# Altium PCB IR_Remote.PcbDoc
Units mm, origin at the board's own origin, x right, y up, seen from the top; angles counter-clockwise.
Board outline 73 x 54 mm, 2 copper layers (Top Layer, Bottom Layer), stack 1.271 mm thick; 108 components, 72 nets, 302 pads, 204 vias.
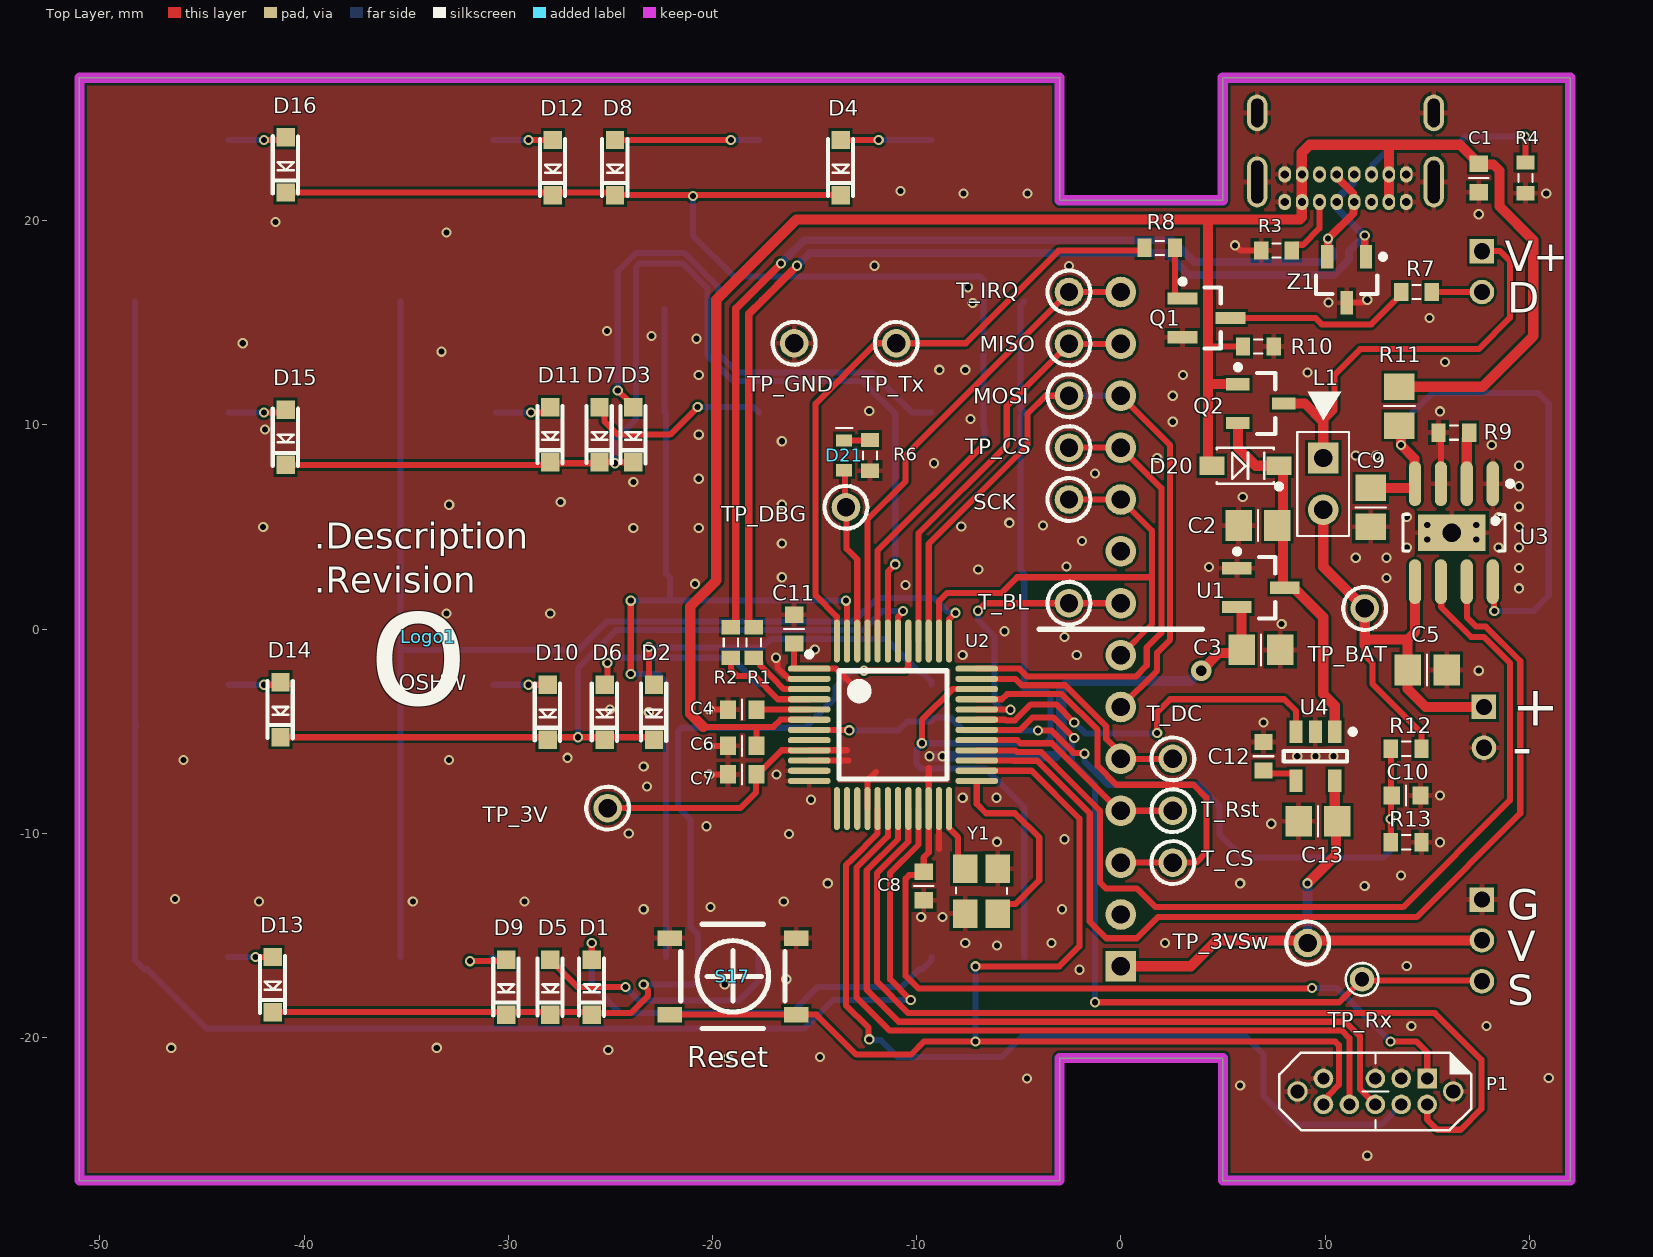
[diagram p0: Top Layer view]
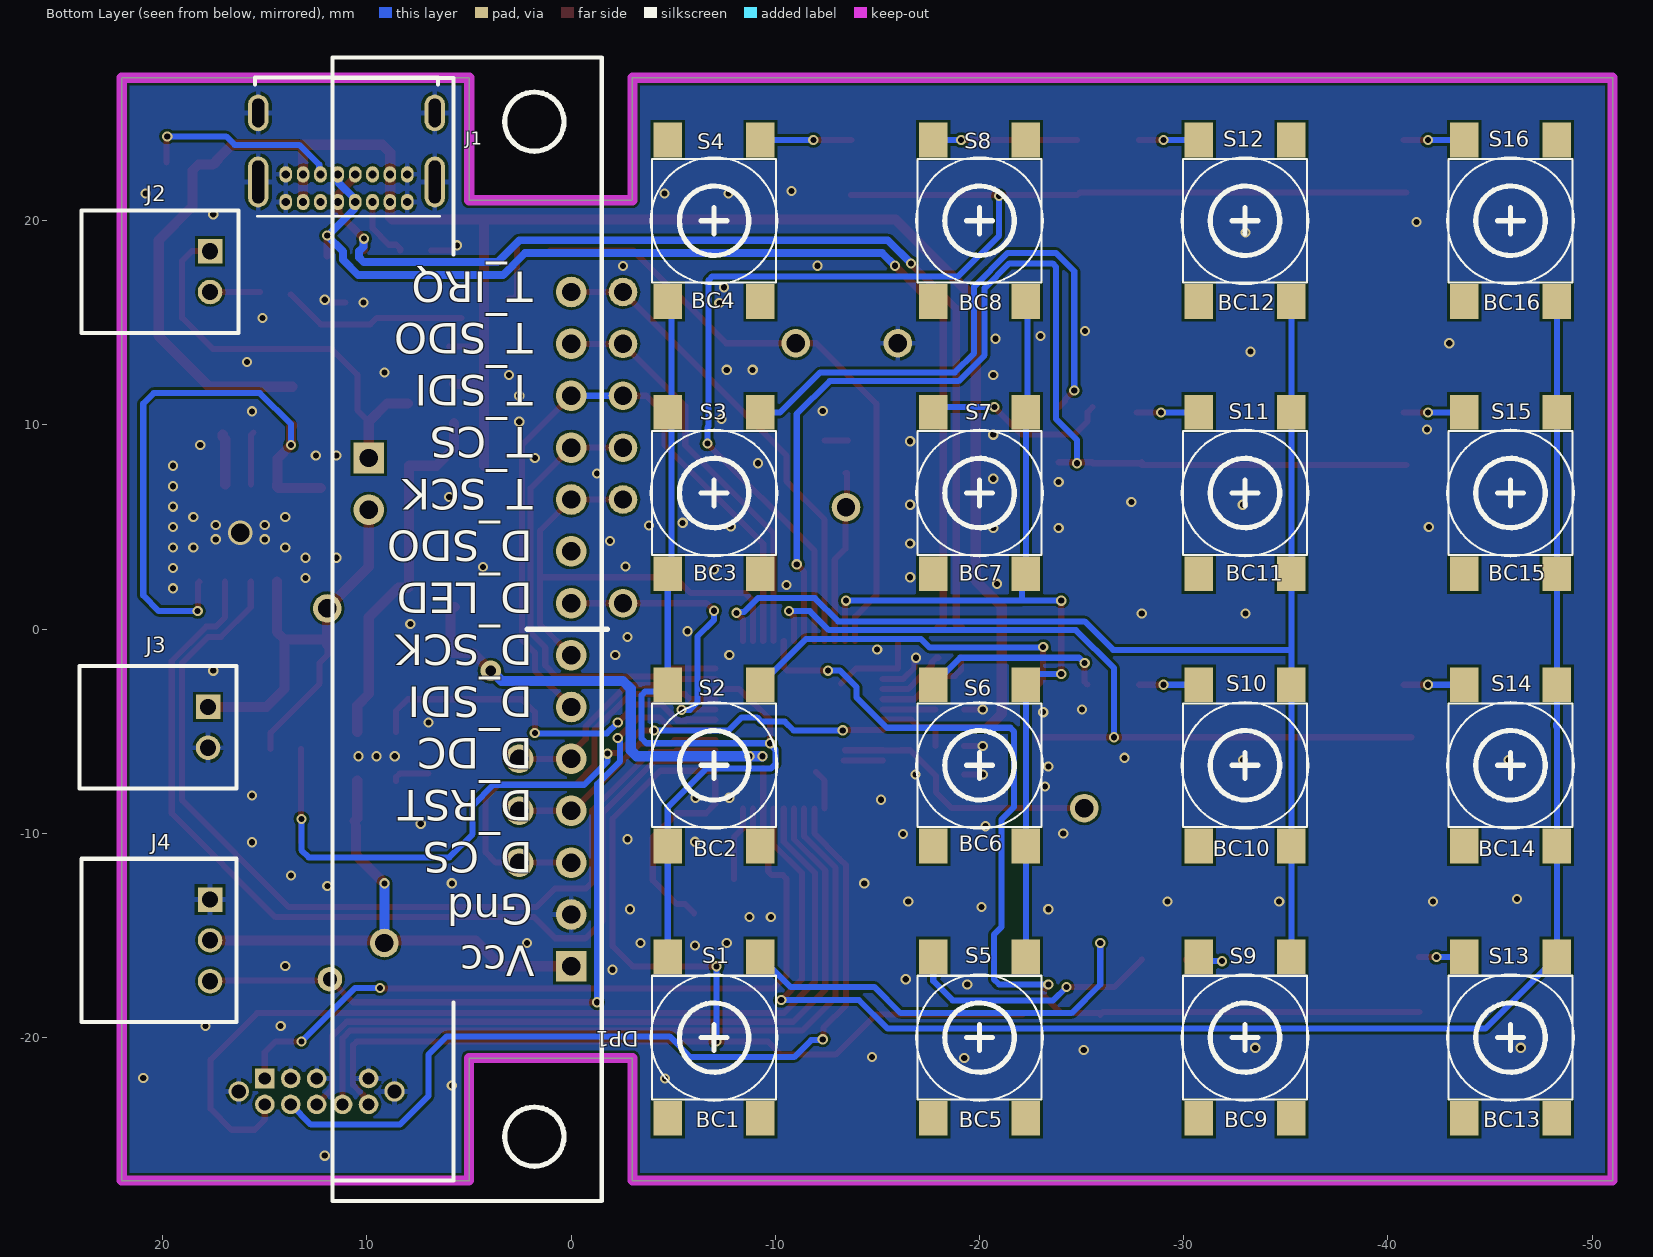
[diagram p1: Bottom Layer view, seen from below]
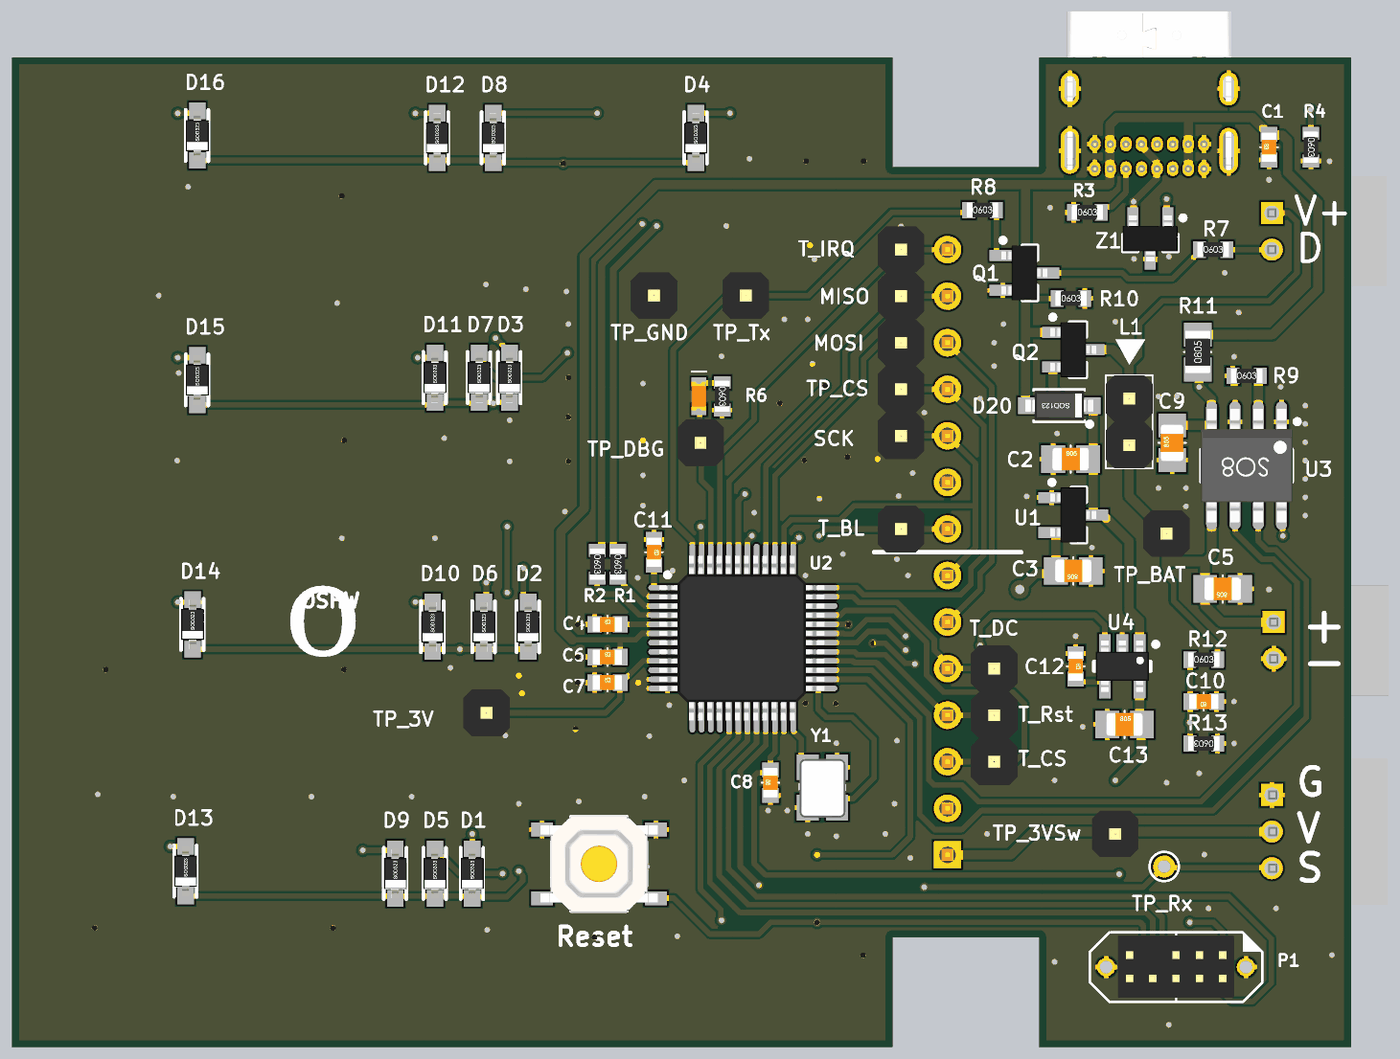
[diagram p2: 3D render of the assembled board from above, using the file's embedded part models]
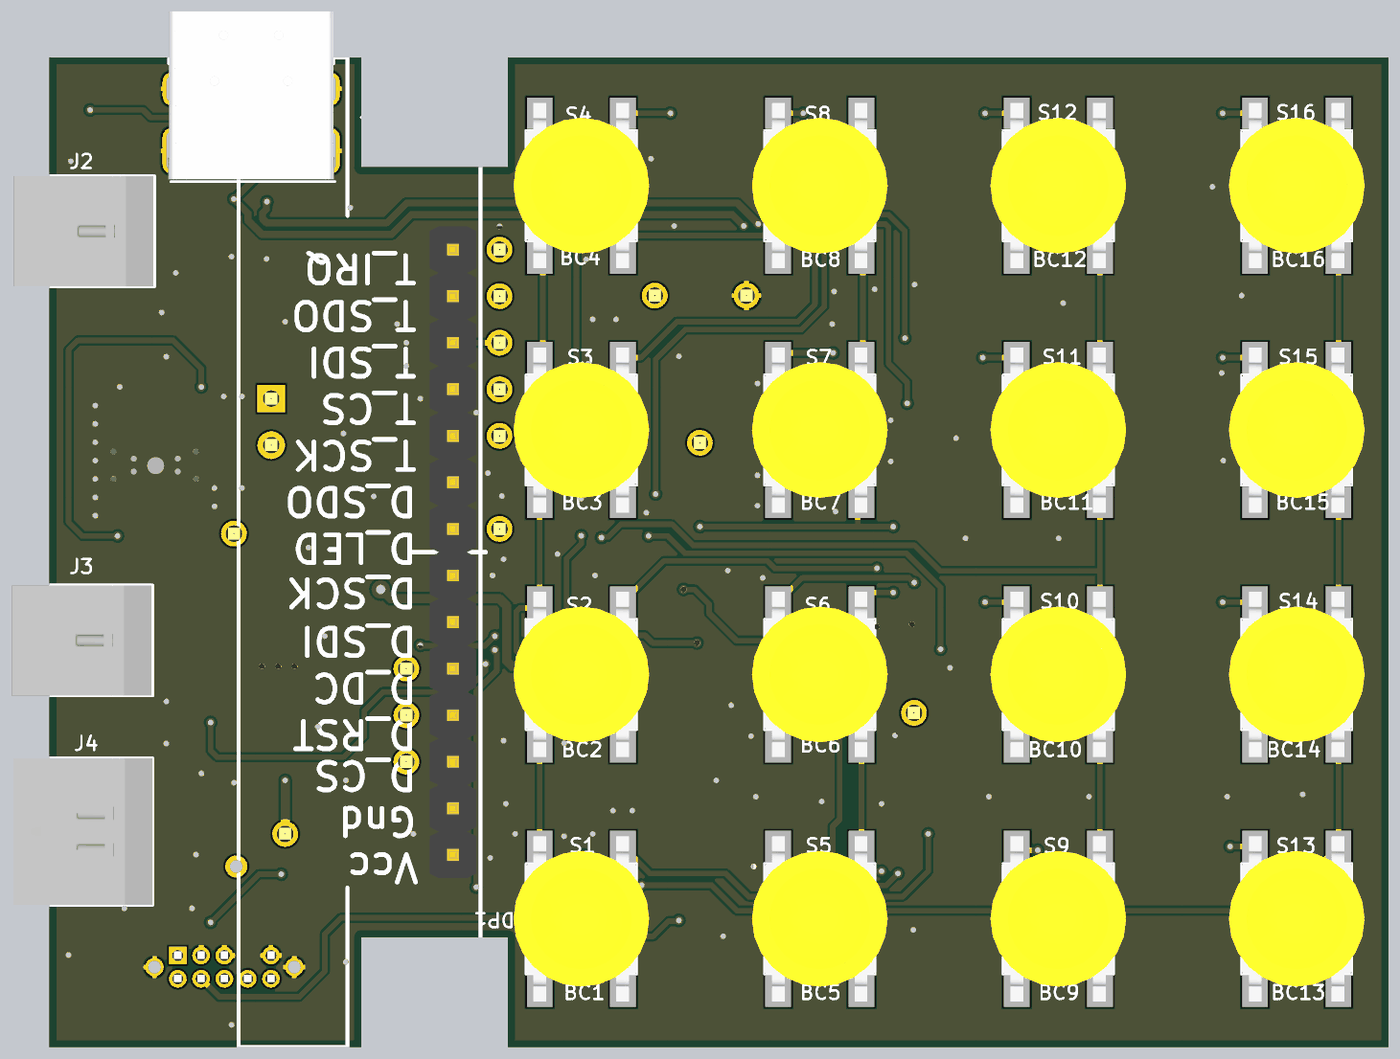
[diagram p3: 3D render of the assembled board from below, using the file's embedded part models]

## Layer stack, top to bottom
Top Solder: solder mask 0.0102, Solder Resist, Dk 3.5
Top Layer: signal copper 0.0356
Dielectric 1: dielectric 1.2, FR-4, Dk 4.8
Bottom Layer: signal copper 0.0356
Bottom Solder: solder mask 0.0102, Solder Resist, Dk 3.5

## Board outline
-51,-27 -51,27 -3,27 -3,21 5,21 4.988,21.012 4.988,27 22,27 22,-27 5,-27 5,-21 -3,-21 -3,-27

## Design rules (kind name [scope] priority, off if disabled: settings)
AssemblyTestPointUsage SilkToBoardRegionClearance_1 [All] p2:
AssemblyTestPointUsage SilkToBoardRegionClearance [All] p3:
Clearance [All] p1: gap=0.127 ignorepadtopadclearanceinfootprint=FALSE
DiffPairsRouting [All] p1: maxlimit=0.254 minlimit=0.254 mostfreqgap=0.254 toplayer_minwidth=0.381 toplayer_maxwidth=0.381 toplayer_prefwidth=0.381 bottomlayer_minwidth=0.381 bottomlayer_maxwidth=0.381 bottomlayer_prefwidth=0.381 maxuncoupledlength=12.7
HoleSize [All] p1: absolutevalues=TRUE maxlimit=6.35 minlimit=0.25 maxpercent=80.000 minpercent=20.000
MatchedLengths DiffPair_DIFF100MatchedLengths [InDifferentialPairClass('DIFF100')] p1: tolerance=0.152 checknetsindiffpair=TRUE checkdiffpairvsdiffpair=FALSE checkxsignals=FALSE checkothers=FALSE
MinimumAnnularRing [All] p1: minimumring=0.089
MinimumSolderMaskSliver [All] p1 off: minsoldermaskwidth=0.1
MinimumSolderMaskSliver SilkscreenOverComponentPads_2 [All] p2 off: minsoldermaskwidth=0.254
MinimumSolderMaskSliver SilkToSolderMaskClearance_1 [IsPad] p3 off: minsoldermaskwidth=0.254
MinimumSolderMaskSliver SilkscreenOverComponentPads_1 [All] p4 off: minsoldermaskwidth=0.254
MinimumSolderMaskSliver SilkToSolderMaskClearance [IsPad] p5 off: minsoldermaskwidth=0.254
MinimumSolderMaskSliver SilkscreenOverComponentPads [All] p6 off: minsoldermaskwidth=0.254
NetAntennae [All] p1 off: netantennaetolerance=0
PlaneClearance [All] p1: clearance=0.254
PlaneConnect [All] p1: planeconnectstyle=Relief reliefexpansion=0.508 reliefentries=4 reliefconductorwidth=0.254 reliefairgap=0.152
PolygonConnect PolygonConnect_Via [IsVia] p1: connectstyle=Direct reliefconductorwidth=0.254 reliefentries=4 polygonreliefangle="90 Angle" airgapwidth=0.254
PolygonConnect [All] p2: connectstyle=Relief reliefconductorwidth=0.254 reliefentries=4 polygonreliefangle="90 Angle" airgapwidth=0.152
RoomDefinition IR_Remote_Keypad [InComponentClass('IR_Remote_Keypad')] p1: confinementstyle=ConfineIn formatcopy=TRUE lockcomponents=FALSE outline -58.86,-29.845 61.409,-29.845 61.409,29.972 -58.86,29.972
RoutingVias [All] p1: holewidth=0.5 width=1 viastyle="Through Hole" minholewidth=0.305 minwidth=0.635 maxholewidth=0.711 maxwidth=1.27
SilkToBoardRegionClearance SilkToBoardRegionClearance_2 [All] p1 off:
SilkToSilkClearance [All] p1 off: silktosilkclearance=0.254
SilkToSolderMaskClearance SilkToSolderMaskClearance_2 [IsPad] p1 off: minsilkscreentomaskgap=0.254 clearancetoexposedcopper=TRUE
SolderMaskExpansion SolderMaskExpansion_Via [isVia] p1: expansion=0.102 istentingtop=TRUE
SolderMaskExpansion [All] p2: expansion=0.102 istentingtop=FALSE
SupplyNets "Schematic Supply Nets_6" [InNet('BAT++')] p1: voltage=0.000
SupplyNets "Schematic Supply Nets" [InNet('3V3')] p2: voltage=0.000
SupplyNets "Schematic Supply Nets_5" [InNet('BAT+')] p3: voltage=0.000
SupplyNets "Schematic Supply Nets_4" [InNet('Gnd')] p4: voltage=0.000
SupplyNets "Schematic Supply Nets_3" [InNet('5Vusb')] p5: voltage=0.000
SupplyNets "Schematic Supply Nets_2" [InNet('Vout3V3')] p6: voltage=0.000
SupplyNets "Schematic Supply Nets_1" [InNet('3V3Sw')] p7: voltage=0.000
Width [All] p1: maxlimit=2.54 minlimit=0.152 preferedwidth=0.3
21 further rules are at their usual default settings.

## Classes and differential pairs
component class IR_Remote_Keypad: BC1 BC2 BC3 BC4 BC5 BC6 BC7 BC8 BC9 BC10 BC11 BC12 BC13 BC14 BC15 BC16 D1 D2 D3 D4 D5 D6 D7 D8 D9 D10 D11 D12 D13 D14 D15 D16 S1 S2 S3 S4 S5 S6 S7 S8 S9 S10 S11 S12 S13 S14 S15 S16
component class IR_Remote: C1 C2 C3 C4 C5 C6 C7 C8 C9 C10 C11 C12 C13 D20 D21 DP1 J1 J2 J3 J4 L1 Logo1 MISO MOSI P1 Q1 Q2 R1 R2 R3 R4 R6 R7 R8 R9 R10 R11 R12 R13 RN? S17 SCK T_BL T_CS T_DC T_IRQ T_Rst TP_3V TP_3VSw TP_BAT TP_CS TP_DBG TP_GND TP_Rx TP_Tx U1 U2 U3 U4 Y1 Z1
differential pair USBD_R: +USBD_R_P -USBD_R_N

## Components (designator, comment, footprint, x,y, rotation, side; value= is the part's Value field where it differs from the comment)
BC1 "Button cap" BUTTON-CAP-WITH-SKIRT -7,-20 r0 bottom locked
BC2 "Button cap" BUTTON-CAP-WITH-SKIRT -7,-6.667 r0 bottom locked
BC3 "Button cap" BUTTON-CAP-WITH-SKIRT -7,6.667 r0 bottom locked
BC4 "Button cap" BUTTON-CAP-WITH-SKIRT -7,20 r0 bottom locked
BC5 "Button cap" BUTTON-CAP-WITH-SKIRT -20,-20 r0 bottom locked
BC6 "Button cap" BUTTON-CAP-WITH-SKIRT -20,-6.667 r0 bottom locked
BC7 "Button cap" BUTTON-CAP-WITH-SKIRT -20,6.667 r0 bottom locked
BC8 "Button cap" BUTTON-CAP-WITH-SKIRT -20,20 r0 bottom locked
BC9 "Button cap" BUTTON-CAP-WITH-SKIRT -33,-20 r0 bottom locked
BC10 "Button cap" BUTTON-CAP-WITH-SKIRT -33,-6.667 r0 bottom locked
BC11 "Button cap" BUTTON-CAP-WITH-SKIRT -33,6.667 r0 bottom locked
BC12 "Button cap" BUTTON-CAP-WITH-SKIRT -33,20 r0 bottom locked
BC13 "Button cap" BUTTON-CAP-WITH-SKIRT -46,-20 r0 bottom locked
BC14 "Button cap" BUTTON-CAP-WITH-SKIRT -46,-6.667 r0 bottom locked
BC15 "Button cap" BUTTON-CAP-WITH-SKIRT -46,6.667 r0 bottom locked
BC16 "Button cap" BUTTON-CAP-WITH-SKIRT -46,20 r0 bottom locked
C1 "100nF" CCNP1608-0603_N 17.526,22.098 r90 top
C2 "10uF" CCNP2012-0805 6.714,5.079 r0 top
C3 "10uF" CCNP2012-0805 6.858,-1.016 r180 top
C4 "2.2uF" CCNP1608-0603_N -18.542,-3.937 r0 top
C5 "10uF" CCNP2012-0805 15,-2 r180 top
C6 "100nF" CCNP1608-0603_N -18.542,-5.715 r0 top
C7 "100nF" CCNP1608-0603_N -18.542,-7.112 r0 top
C8 "100nF" CCNP1608-0603_N -9.652,-12.573 r90 top
C9 "10uF" CCNP2012-0805 12.243,5.969 r90 top
C10 "100nF" CCNP1608-0603_N 13.97,-8.147 r180 top
C11 "100nF" CCNP1608-0603_N -16.002,0 r270 top
C12 "10nF" CCNP1608-0603_N 6.985,-6.223 r270 top
C13 "10uF" CCNP2012-0805 9.652,-9.398 r0 top
D1 "1N4148WS" SOD-323 -25.908,-17.526 r90 top
D2 "1N4148WS" SOD-323 -22.86,-4.064 r90 top
D3 "1N4148WS" SOD-323 -23.876,9.525 r90 top
D4 "1N4148WS" SOD-323 -13.716,22.606 r90 top
D5 "1N4148WS" SOD-323 -27.94,-17.526 r90 top
D6 "1N4148WS" SOD-323 -25.273,-4.064 r90 top
D7 "1N4148WS" SOD-323 -25.527,9.525 r90 top
D8 "1N4148WS" SOD-323 -24.765,22.606 r90 top
D9 "1N4148WS" SOD-323 -30.099,-17.526 r90 top
D10 "1N4148WS" SOD-323 -28.067,-4.064 r90 top
D11 "1N4148WS" SOD-323 -27.94,9.525 r90 top
D12 "1N4148WS" SOD-323 -27.813,22.606 r90 top
D13 "1N4148WS" SOD-323 -41.529,-17.399 r90 top
D14 "1N4148WS" SOD-323 -41.148,-3.937 r90 top
D15 "1N4148WS" SOD-323 -40.894,9.398 r90 top
D16 "1N4148WS" SOD-323 -40.894,22.733 r90 top
D20 "B5819W" SOD-123 6.096,8.001 r180 top
D21 "LED Red" LED1608-0603-RED_N -13.554,8.509 r270 top
DP1 "TFT Display" "TFT_320x480 - connector only" 0,-16.51 r0 bottom locked
J1 "USB4085-GF-A" USB4085-GF-A 11,23.1 r270 bottom locked
J2 "Connector - JST PH 2-Pin right-angle" JST-P2B-PH-RA 17.68,18.51 r90 bottom locked
J3 "Connector - JST PH 2-Pin right-angle" JST-P2B-PH-RA 17.78,-3.81 r90 bottom locked
J4 "Connector - JST PH 3-Pin right-angle" JST-P3B-PH-RA 17.68,-13.24 r90 bottom locked
L1 "Header, 2-Pin" HDR1X2S 9.906,8.382 r270 top
Logo1 "OSHW Logo" OSHW -33.909,-0.381 r0 top
MISO "TP" "PCBPIN - 0.9mm" -2.54,13.97 r0 top
MOSI "TP" "PCBPIN - 0.9mm" -2.54,6.35 r0 top
P1 "SWD Connector 2x5-Pin" SWD-2X5-JIG-HEADER 15,-22 r180 top locked
Q1 "MMBT3904LT1G" SOT23_M 4.191,15.24 r180 top
Q2 "SI2301CDS-T1-GE3" SOT23_N 6.858,11.049 r180 top
R1 "330R" CR1608-0603_N -17.979,-0.652 r270 top
R2 "330R" CR1608-0603_N -19.097,-0.652 r270 top
R3 "5.1K" CR1608-0603_N 7.62,18.542 r0 top
R4 "5.1K" CR1608-0603_N 19.812,22.098 r270 top
R6 "10K" CR1608-0603_N -12.284,8.509 r270 top value=10k
R7 "0R" CR1608-0603_N 14.478,16.51 r0 top
R8 "10k" CR1608-0603_N 1.905,18.669 r0 top
R9 "1.5k" CR1608-0603_N 16.307,9.627 r0 top
R10 "75k" CR1608-0603_N 6.731,13.843 r0 top
R11 "0R4" CR2012-0805 13.64,10.922 r90 top
R12 "56k" CR1608-0603_N 13.97,-5.861 r0 top
R13 "56k" CR1608-0603_N 13.97,-10.433 r180 top
S1 "SW_SMT_14mm" SW_SMT_14MM -7,-20 r270 bottom locked
S2 "SW_SMT_14mm" SW_SMT_14MM -7,-6.667 r270 bottom locked
S3 "SW_SMT_14mm" SW_SMT_14MM -7,6.667 r270 bottom locked
S4 "SW_SMT_14mm" SW_SMT_14MM -7,20 r270 bottom locked
S5 "SW_SMT_14mm" SW_SMT_14MM -20,-20 r270 bottom locked
S6 "SW_SMT_14mm" SW_SMT_14MM -20,-6.667 r270 bottom locked
S7 "SW_SMT_14mm" SW_SMT_14MM -20,6.667 r270 bottom locked
S8 "SW_SMT_14mm" SW_SMT_14MM -20,20 r270 bottom locked
S9 "SW_SMT_14mm" SW_SMT_14MM -33,-20 r270 bottom locked
S10 "SW_SMT_14mm" SW_SMT_14MM -33,-6.667 r270 bottom locked
S11 "SW_SMT_14mm" SW_SMT_14MM -33,6.667 r270 bottom locked
S12 "SW_SMT_14mm" SW_SMT_14MM -33,20 r270 bottom locked
S13 "SW_SMT_14mm" SW_SMT_14MM -46,-20 r270 bottom locked
S14 "SW_SMT_14mm" SW_SMT_14MM -46,-6.667 r270 bottom locked
S15 "SW_SMT_14mm" SW_SMT_14MM -46,6.667 r270 bottom locked
S16 "SW_SMT_14mm" SW_SMT_14MM -46,20 r270 bottom locked
S17 "Reset" SMD-SW-4_5.1x5.1x3.5_M -19,-17 r0 top locked
SCK "TP" "PCBPIN - 0.9mm" -2.54,11.43 r0 top
T_BL "TP" "PCBPIN - 0.9mm" -2.54,1.27 r0 top
T_CS "TP" "PCBPIN - 0.9mm" 2.54,-11.43 r0 top
T_DC "TP" "PCBPIN - 0.9mm" 2.54,-6.35 r0 top
T_IRQ "TP" "PCBPIN - 0.9mm" -2.54,16.51 r0 top
T_Rst "TP" "PCBPIN - 0.9mm" 2.54,-8.89 r0 top
TP_3V "TP" "PCBPIN - 0.9mm" -25.132,-8.763 r90 top
TP_3VSw "TP" "PCBPIN - 0.9mm" 9.144,-15.367 r90 top
TP_BAT "TP" "PCBPIN - 0.9mm" 11.938,1.016 r90 top
TP_CS "TP" "PCBPIN - 0.9mm" -2.54,8.89 r90 top
TP_DBG "TP" "PCBPIN - 0.9mm" -13.462,5.969 r90 top
TP_GND "TP" "PCBPIN - 0.9mm" -16,14 r90 top
TP_Rx "TP" "PCBPIN - 0.7mm" 11.811,-17.145 r0 top
TP_Tx "TP" "PCBPIN - 0.9mm" -11,14 r90 top
U1 "XC6206P332MR" SOT23_M 6.858,2.032 r180 top
U2 "MK20DX128VLF5" TSQFP50P900X900-48M -11.159,-4.683 r270 top locked
U3 "TP4056" ESOP8 16.305,4.724 r180 top
U4 "SPX3819M5-L-3-3/TR" SOT23-5_N 9.525,-6.223 r90 top
Y1 "16 MHz" Crystal_SMD_3.2x2.5 -6.823,-12.827 r270 top
Z1 "GSOT05C-GS08" SOT23_N 11.055,17.113 r90 top

## Footprints (in the part's own frame and the unit in brackets; to place one, negate y for a bottom-side part, rotate by r counter-clockwise, add the part's x,y. Pads: shape width x height; smd on the part's side, far side on the other; paste and mask are expansions set on the pad)
BUTTON-CAP-WITH-SKIRT [mm] "5.5 mm x 4.5mm (WxH) button cap for small tactile switches"
  silkscreen extent -3.1,-3.1 3.1,3.1, body extent -3.69,-3.7 3.7,3.7, height 16
CCNP1608-0603_N [mm]
  rect 0.8x0.9 smd: 1(-0.7,0) 2(0.7,0)
  silkscreen extent 0,-0.48 0,0.48, body extent -0.8,-0.4 0.8,0.4, height 0.3
CCNP2012-0805 [mm]
  rect 1.3x1.5 smd: 1(-0.95,0) 2(0.95,0)
  silkscreen extent 0,-0.75 0,0.75, body extent -1,-0.62 1,0.63, height 0.78
CR1608-0603_N [mm]
  rect 0.7x0.9 smd: 1(-0.75,0) 2(0.75,0)
  silkscreen extent -0.2,-0.35 0.2,0.35, body extent -0.85,-0.4 0.85,0.4, height 0.56
CR2012-0805 [mm]
  rect 1.3x1.5 smd: 1(-0.95,0) 2(0.95,0)
  silkscreen extent 0,-0.75 0,0.75, body extent -1.15,-0.67 1.15,0.68, height 0.76
Crystal_SMD_3.2x2.5 [mm] "Crystal SMT low profile 3.2 x 2.5 SMD"
  rect 1.4x1.2 smd: 1(-1.1,-0.8) 2(1.1,-0.8) 3(1.1,0.8) 4(-1.1,0.8)
  silkscreen extent -0.17,-1.25 0.15,1.25, body extent -1.55,-1.24 1.65,1.26, height 0.7
ESOP8 [mm] "8-Pin Small Outline Integrated Circuit 1.27 mm Pitch, IPC Medium Density with heat pad"
  rect 3.3x1.8 smd: 0(0.1,0)
  oval 0.6x2.2 smd: 1(-1.905,-2.4) 2(-0.635,-2.4) 3(0.635,-2.4) 4(1.905,-2.4) 5(1.905,2.4) 6(0.635,2.4) 7(-0.635,2.4) 8(-1.905,2.4)
  silkscreen extent -2.88,-2.52 2.5,0.9, body extent -2.5,-3.1 2.5,3.1, height 1.75
HDR1X2S [mm] "Header; 2 Position; Straight"
  rect 1.5x1.5 hole 0.9: 1(0,0)
  round 1.5 hole 0.9: 2(2.54,0)
  silkscreen extent -3.24,-1.27 3.81,1.27, body extent -1.27,-1.27 3.81,1.27, height 6
JST-P2B-PH-RA [mm] "JST-PH 2 pin connector right-angle"
  rect 1.2x1.2 hole 0.8: 1(0,0)
  round 1.2 hole 0.8: 2(-2,0)
  silkscreen extent -4,-1.4 2,6.3, body extent -4,-1.35 2,6.25, height 5
JST-P3B-PH-RA [mm] "JST-PH 3 pin  connector right-angle"
  rect 1.2x1.2 hole 0.8: 1(0,0)
  round 1.2 hole 0.8: 2(-2,0) 3(-4,0)
  silkscreen extent -6,-1.3 2,6.3, body extent -6,-1.3 2,6.3, height 5
LED1608-0603-RED_N [mm] "SMT-LED 0603"
  rect 0.6x0.8 smd: A(0.725,0) K(-0.725,0)
  silkscreen extent -1.35,-0.39 -1.35,0.41, body extent -0.8,-0.4 0.8,0.4, height 0.7
OSHW [mm] "OSHW Logo"
"PCBPIN - 0.7mm" [mm]
  round 1.2 hole 0.7: 1(0,0)
  silkscreen extent -0.8,-0.8 0.8,0.8
"PCBPIN - 0.9mm" [mm]
  round 1.4 hole 0.9: 1(0,0)
  silkscreen extent -1.05,-1.05 1.05,1.05, body extent -1.27,-1.27 1.27,1.27, height 6
SMD-SW-4_5.1x5.1x3.5_M [mm] "Miniature SMD PCB Push Button - C318886"
  rect 1.2x0.762 smd: 1(3.1,-1.875) 1b(-3.1,-1.875) 2(3.1,1.875) 2b(-3.1,1.875)
  silkscreen extent -2.55,-2.55 2.55,2.55, body extent -3.2,-2.65 3.2,2.65, height 3.5
SOD-123 [mm] "SOD-123; 2 Leads; Body 2.7 x 1.6 mm, (LxW)"
  rect 1.22x0.91 smd: A(1.64,0) K(-1.64,0)
  silkscreen extent -1.78,-0.89 1.41,1.14, body extent -1.85,-0.77 1.85,0.78, height 1.35
SOD-323 [mm]
  rect 0.9x0.9 smd: A(1.347,0.004) K(-1.353,0.004)
  silkscreen extent -1.4,-0.6 1.4,0.64, body extent -1.35,-0.62 1.35,0.63, height 1.1
SOT23-5_N [mm] "SOT23, 5-Leads, Body 2.9x1.6mm, Pitch 0.95mm, Lead Span 2.7mm, IPC Medium Density"
  rect 1.1x0.65 smd: 1(1.2,-0.95) 2(1.2,0) 3(1.2,0.95) 4(-1.2,0.95) 5(-1.2,-0.95)
  silkscreen extent -0.25,-1.95 1.32,1.55, body extent -1.4,-1.45 1.4,1.45, height 1.45
SOT23_M [mm] "SOT23, 3-Leads, Body 2.9x1.3mm, Pitch 0.95mm, Lead Span 2.3mm - IPC Low Density"
  rect 1.45x0.6 smd: 1(1.175,-0.95) 2(1.175,0.95) 3(-1.175,0)
  silkscreen extent -0.7,-1.9 1.29,1.5, body extent -1.25,-1.5 1.25,1.5, height 1.05
SOT23_N [mm] "SOT23, 3-Leads, Body 2.9x1.3mm, Pitch 0.95mm, Lead Span 2.3mm - IPC Medium Density"
  rect 1.15x0.6 smd: 1(1.125,-0.95) 2(1.125,0.95) 3(-1.125,0)
  silkscreen extent -0.7,-1.9 1.25,1.5, body extent -1.25,-1.5 1.25,1.5, height 1.05
SW_SMT_14MM [mm] "SMT Tactile Switch / 14.7 mm stem (from PCB)"
  rect 1.7x1.4 smd: 1(-3.95,2.27) 1b(3.95,2.27) 2(-3.95,-2.27) 2b(3.95,-2.27)
  silkscreen extent -3.03,-3.03 3.03,3.03, body extent -4.5,-3 4.5,3, height 14.7
SWD-2X5-JIG-HEADER [mm] "Connector; SWD; 2x5 Position"
  round 1 hole 0.7: 0(-1.27,0.635) 0(6.35,0.635)
  rect 0.96x0.96 hole 0.6: 1(0,0)
  round 0.96 hole 0.6: 2(0,1.27) 3(1.27,0) 4(1.27,1.27) 5(2.54,0) 6(2.54,1.27) 8(3.81,1.27) 9(5.08,0) 10(5.08,1.27)
  silkscreen extent -2.16,-1.26 7.24,2.53, body extent -0.63,-1.09 5.72,2.31, height 4.5
"TFT_320x480 - connector only" [mm] "TFT Display 320x480 with touch (IL9488+XPT2046)"
  rect 1.5x1.5 hole 0.9: 1(0,0)
  round 1.5 hole 0.9: 2(0,-2.54) 3(0,-5.08) 4(0,-7.62) 5(0,-10.16) 6(0,-12.7) 7(0,-15.24) 8(0,-17.78) 9(0,-20.32) 10(0,-22.86) 11(0,-25.4) 12(0,-27.94) 13(0,-30.48) 14(0,-33.02)
  silkscreen extent -1.5,-44.51 11.68,11.49, body extent -1.27,-34.29 1.27,1.27, height 8.57
TSQFP50P900X900-48M [mm] "Thin QFP, 48-Leads, Body 7x7mm, Pitch 0.5mm, IPC Low Density"
  oval 0.3x2.1 smd: 1(-2.75,-4.1) 2(-2.25,-4.1) 3(-1.75,-4.1) 4(-1.25,-4.1) 5(-0.75,-4.1) 6(-0.25,-4.1) 7(0.25,-4.1) 8(0.75,-4.1) 9(1.25,-4.1) 10(1.75,-4.1) 11(2.25,-4.1) 12(2.75,-4.1) 25(2.75,4.1) 26(2.25,4.1) 27(1.75,4.1) 28(1.25,4.1) 29(0.75,4.1) 30(0.25,4.1) 31(-0.25,4.1) 32(-0.75,4.1) 33(-1.25,4.1) 34(-1.75,4.1) 35(-2.25,4.1) 36(-2.75,4.1)
  oval 2.1x0.3 smd: 13(4.1,-2.75) 14(4.1,-2.25) 15(4.1,-1.75) 16(4.1,-1.25) 17(4.1,-0.75) 18(4.1,-0.25) 19(4.1,0.25) 20(4.1,0.75) 21(4.1,1.25) 22(4.1,1.75) 23(4.1,2.25) 24(4.1,2.75) 37(-4.1,2.75) 38(-4.1,2.25) 39(-4.1,1.75) 40(-4.1,1.25) 41(-4.1,0.75) 42(-4.1,0.25) 43(-4.1,-0.25) 44(-4.1,-0.75) 45(-4.1,-1.25) 46(-4.1,-1.75) 47(-4.1,-2.25) 48(-4.1,-2.75)
  silkscreen extent -3.57,-4.22 2.65,2.65, body extent -4.5,-4.55 4.5,4.45, height 1.6
USB4085-GF-A [mm] "USB-C Connector"
  oval 0.8x0.62 hole 0.4: A1(2.18,2.975) A4(2.18,2.125) A5(2.18,1.275) A6(2.18,0.425) A7(2.18,-0.425) A8(2.18,-1.275) A9(2.18,-2.125) A12(2.18,-2.975) B1(0.83,-2.975) B4(0.83,-2.125) B5(0.83,-1.275) B6(0.83,-0.425) B7(0.83,0.425) B8(0.83,1.275) B9(0.83,2.125) B12(0.83,2.975)
  oval 1.8x1 hole 0.6 slot 1.4 at 0 deg: SH(-2.18,-4.325) SH(-2.18,4.325)
  oval 2.5x1 hole 0.6 slot 2.1 at 0 deg: SH(1.2,-4.325) SH(1.2,4.325)
  silkscreen extent -3.92,-4.47 2.88,4.57, body extent -6.41,-4.52 2.76,4.51, height 3.46

## Part data
BC1 BC2 BC3 BC4 BC5 BC6 BC7 BC8 BC9 BC10 BC11 BC12 BC13 BC14 BC15 BC16: library part "Small Button Cap", "6.2mm x 6mm (WxH) button cap"
C1 C6 C7 C8 C10 C11: library part Cap_CCNP_0603, "Capacitor non-polar SMT 0603", LCSC=C14663, Manufacturer="Generic Components", Class=Passive, Published=08/06/2000, Publisher="Altium Hobart Technology Centre", SubClass=Capacitor
C2 C3 C5 C9 C13: library part Cap, "Capacitor", LCSC=C15850, Manufacturer="Generic Components", Class=Passive, Published=08/06/2000, Publisher="Altium Hobart Technology Centre", SubClass=Capacitor
C4: library part Cap_CCNP_0603, "Capacitor non-polar SMT 0603", LCSC=C23630, Manufacturer="Generic Components", Class=Passive, Published=08/06/2000, Publisher="Altium Hobart Technology Centre", SubClass=Capacitor
C12: library part Cap_CCNP_0603_10nF, "50V 10nF X7R ±10% 0603 MLCC", LCSC=C57112, Manufacturer="Generic Components", Class=Passive, Published=08/06/2000, Publisher="Altium Hobart Technology Centre", SubClass=Capacitor
D1 D2 D3 D4 D5 D6 D7 D8 D9 D10 D11 D12 D13 D14 D15 D16: "Diode - Switching 100V 150mA 1.25V@150mA 4ns SOD-323", LCSC=C2128, Class=Discrete, Farnell PN=2889105, SubClass="Diode - Switching"
D20: "Diode - Schottky 1A 40V Vrm SOD-123", LCSC=C8598, Manufacturer="Generic Components", Class=Discrete, Published=08/06/2000, Publisher="Altium Hobart Technology Centre", SubClass="Diode - Switching"
D21: library part LED-0603-Red, "LED 0603 Red", LCSC=C2286, Manufacturer="Generic Components", Class I=Optoelectronic, Class II=LED, Farnell PN=1581239, Published=8-Jun-2000, Publisher="Altium Limited", Revision="July-2002: Re-released for DXP Platform."
DP1: library part TFT_320x480, "TFT Display 320x480 with touch (IL9488+XPT2046)"
J1: "USB-C, USB 2.0 Receptacle Connector 16 Position Through Hole, Right Angle", Digikey Part Number=2073-USB4085-GF-ACT-ND, Angle=90, Digikey=2073-USB4085-GF-ACT-ND, Digikey Link=https://www.digikey.ee/product-detail/en/gct/USB4085-GF-A/2073-USB4085-GF-ACT-ND/9859733, Farnell PN=2924867, Part Number=USB4085-GF-A
J2 J3: library part JST-B2B-PH-B, LatestRevisionDate=17-Jul-2002, LatestRevisionNote="Re-released for DXP Platform.", Publisher="Altium Limited"
J4: library part JST-B3B-PH-B, Digikey=455-2248-ND, Farnell PN=1516277, LatestRevisionDate=17-Jul-2002, LatestRevisionNote="Re-released for DXP Platform.", Publisher="Altium Limited"
L1: library part "Header 1x2", LatestRevisionDate=17-Jul-2002, LatestRevisionNote="Re-released for DXP Platform.", Publisher="Altium Limited"
MISO MOSI SCK T_BL T_CS T_DC T_IRQ T_Rst TP_3V TP_3VSw TP_BAT TP_CS TP_DBG TP_GND TP_Rx TP_Tx: "Test Point"
P1: library part SWD2X5_JIG, Farnell PN=1865285, LatestRevisionDate=17-Jul-2002, LatestRevisionNote="Re-released for DXP Platform.", Publisher="Altium Limited"
Q1: "NPN General Purpose Transistor, NPN Silicon, 3-Pin SOT-23, Pb-Free, Tape and Reel", LCSC=C20526, Manufacturer="On Semiconductor", ComponentLink1Description="Manufacturer URL", ComponentLink1URL=http://www.onsemi.com/, ComponentLink2Description=Datasheet, ComponentLink2URL=http://www.onsemi.cn/pub_link/Collateral/MMBT3904LT1-D.PDF, ComponentLink3Description="Package Specification", ComponentLink3URL=http://www.onsemi.cn/pub_link/Collateral/318-08.PDF, DatasheetVersion="Rev. 12", fT Min (MHz)=300, IC Continuous (A)=0.2, Mounting Technology="Surface Mount", PackageDescription="3-Pin Small Outline Transistor, Body 2.92 x 1.3 mm, Pitch 0.95 mm", PackageReference=SOT-23-3-318-08, PackageVersion="Rev. AP, 11/2009", Packing="Tape and Reel", PartNumber=MMBT3904LT1G, Polarity=NPN, RoHS=TRUE
Q2: "TrenchFET Power MOSFET, P-Channel Enhancement Mode FET 20V RdsOn~.14Ohm", LCSC=C10487
R1 R2: library part Res_CR0603, "Resistor SMT 0603", LCSC=C22775, Manufacturer="Generic Components", Class=Passive, Published=08/06/2000, Publisher="Altium Hobart Technology Centre", SubClass=Resistor
R3 R4: library part Res_CR0603, "Resistor SMT 0603", LCSC=C23186, Manufacturer="Generic Components", Class=Passive, Published=08/06/2000, Publisher="Altium Hobart Technology Centre", SubClass=Resistor
R6 R8: library part Res_CR0603_10k, "100mW SMT ±1% 0603 Chip Resistor", LCSC=C25804, Manufacturer="Generic Components", Class=Passive, Published=08/06/2000, Publisher="Altium Hobart Technology Centre", SubClass=Resistor
R7: library part Res_CR0603_0R, "100mW SMT ±1% 0603 Chip Resistor", LCSC=C21189, Manufacturer="Generic Components", Class=Passive, Published=08/06/2000, Publisher="Altium Hobart Technology Centre", SubClass=Resistor
R9: library part Res_CR0603_1k5, "100mW SMT ±1% 0603 Chip Resistor", LCSC=C22843, Manufacturer="Generic Components", Class=Passive, Published=08/06/2000, Publisher="Altium Hobart Technology Centre", SubClass=Resistor
R10: library part Res_CR0603_75k, "100mW SMT ±1% 0603 Chip Resistor", LCSC=C23242, Manufacturer="Generic Components", Class=Passive, Published=08/06/2000, Publisher="Altium Hobart Technology Centre", SubClass=Resistor
R11: library part Res_CR0805, "Resistor SMT 0805", LCSC=C25271, Manufacturer="Generic Components", Class=Passive, Published=08/06/2000, Publisher="Altium Hobart Technology Centre", SubClass=Resistor
R12 R13: library part Res_CR0603_56k, "100mW SMT ±1% 0603 Chip Resistor", LCSC=C23206, Manufacturer="Generic Components", Class=Passive, Published=08/06/2000, Publisher="Altium Hobart Technology Centre", SubClass=Resistor
S1 S2 S3 S4 S5 S6 S7 S8 S9 S10 S11 S12 S13 S14 S15 S16: library part SW_PB_SMT, "SMT Switch gull-wing leads common", LCSC=C318888, Revision=1.0
S17: library part SW_PB-TS, "Switch Tactile SPST 5.10mm X 5.10mm / (1.5mm=C318884) / (2.0mm=C318888) / (3.5mm=C318886)", LCSC=C318888, Revision=1.0
U1: "Regulator 3V3 200mA, LDO regulator (Low ESR ceramic caps)", LCSC=C5446, Farnell PN=8796980
U2: "Arm Cortex M4"
U3: "1A Standalone Linear Li-lon Battery Charger with Thermal Regulation"
U4: "Regulator 3.3V LDO with enable", LCSC=C9055, Digikey=1016-1873-1-ND, Farnell PN=2889625
Y1: library part "Crystal 16MHz", "Crystal SMD 3.2 x 2.5 x 0.7 mm", LCSC=C13738, Manufacturer="Generic Components", Class=Oscillator, Published=08/06/2000, Publisher="Altium Hobart Technology Centre", SubClass="Crystal Oscillator"
Z1: "Two-Line ESD Protection in SOT-23", LCSC=C1976097

## Via types
v1: diameter 0.5, hole 0.3, Top Layer to Bottom Layer, tented both sides, 202 vias
v2: diameter 1, hole 0.5, Top Layer to Bottom Layer, tented both sides, 1 vias
v3: diameter 1.2, hole 0.9, Top Layer to Bottom Layer, tented both sides, 1 vias

## Nets (pads, with @x,y where several pads share a name; then routed paths per layer and width w, separated by ;. In a path a pad name is that pad's centre, name@x,y a point inside that pad or via, vN(x,y) a via of type N, cw(c..) or ccw(c..) an arc to the next point about the centre after c; other vN are vias at no path point)
3V3: C3.2 C7.2 C8.2 C11.2 P1.1 TP_3V.1 U1.2 U2.1 U2.9 U2.10 U2.16 U2.22 | length 82.4
  Top Layer w0.3: TP_3V.1 -18.634,-8.763 -17.872,-8.001 -17.872,-7.191 -16.609,-5.928 -16.164,-5.928 -16.159,-5.933 U2.9 U2.9@-15.208,-5.933 ; C11.2@-15.998,-0.7 -15.998,-1.933 -13.942,-1.933 -13.208,-2.667 ; U2.10@-15.258,-6.428 -13.35,-6.428 ; U2.9@-15.258,-5.928 -13.406,-5.928 ; U2.16 -12.409,-7.409 -12,-7 ; U2.22 -9.409,-10.933 -9.652,-11.176 C8.2 -9.825,-12.046 -10.365,-12.046 -10.541,-12.222 -10.541,-16.969 -9.906,-17.604 9.179,-17.604 9.218,-17.564 v1(9.36,-17.564) ; U2.22 -9.408,-6.8 ; v1(13.208,-20.193) 14.478,-20.193 15,-20.715 P1.1
  Top Layer w0.5: v2(3.937,-2.032) 4.801,-1.168 5.756,-1.168 C3.2@5.905,-1.019 ; U1.2 5.735,1.082 5.908,0.909 C3.2
  Bottom Layer w0.3: v1(9.36,-17.564) 10.579,-17.564 v1(13.208,-20.193)
  Bottom Layer w0.5: v1(-9.365,-6.223) v1(-8.73,-6.223) -3.214,-6.223 -2.921,-5.93 -2.921,-2.921 -2.54,-2.54 3.394,-2.54 3.902,-2.032 v2(3.937,-2.032)
3V3Sw: C13.2 DP1.1 J4.2 TP_3VSw.1 U4.5 | length 26.6
  Top Layer w0.5: DP1.1 3.429,-16.51 4.699,-15.24 J4.2@17.78,-15.24 ; v1(9.144,-12.446) 10.541,-11.049 C13.2@10.541,-9.642 ; U4.5 10.475,-9.271 C13.2
  Bottom Layer w0.5: TP_3VSw.1 v1(9.144,-12.446)
5Vusb: C1.2 C6.2 D20.A J1.A4 J1.A9 J1.B4 J1.B9 Q2.1 R10.1 R11.2 U2.6 | length 106.1
  Top Layer w0.3: -20.447,-4.783 -17.013,-4.783 -16.658,-4.428 U2.6@-15.258,-4.428 ; C6.2 -17.842,-4.813 ; 4.384,13.843 R10.1
  Top Layer w0.5: -20.447,-4.783 -21.082,-4.148 -21.082,1.11 -19.812,2.38 -19.812,16.129 -15.875,20.066 4.264,20.066 ; D20.A@4.264,8.001 4.264,20.066 ; 4.318,12.065 4.384,11.999 Q2.1 ; J1.A9 J1.B4 13.125,23.663 13.179,23.717 ; R11.2 17.714,11.872 20.193,14.351 20.193,19.05 18.542,20.701 18.542,22.462 18.249,22.755 17.569,22.755 C1.2 17.476,22.798 17.326,22.948 17.326,22.998 16.607,23.717 13.179,23.717 ; 4.264,20.066 8.766,20.066 8.861,20.161 8.861,23.336 9.242,23.717 13.179,23.717
ADC0_DM0: U2.8
BAT+: J2.1 L1.1 Q2.3 | length 20.5
  Top Layer w0.3: 10.033,10.287 10.465,10.719 10.465,12.465 11.716,13.716 17.526,13.716 19.05,15.24 19.05,18.034 18.574,18.51 J2.1
  Top Layer w0.5: Q2.3 9.017,11.049 9.906,10.16 L1.1
BAT++: C5.2 J3.1 L1.2 R12.2 TP_BAT.1 U3.5 | length 25.3
  Top Layer w0.3: 11.938,-0.762 11.938,-1.27 12.319,-1.651 12.319,-2.667 14.72,-5.068 R12.2
  Top Layer w0.5: L1.2 9.906,3.048 TP_BAT.1 11.938,-0.508 ; 11.938,-0.762 11.938,-0.508 ; U3.5 14.4,-0.144 14.036,-0.508 ; J3.1 14.925,-3.81 14.036,-2.921 14.036,-0.508 ; 11.938,-0.508 14.036,-0.508
BatteryLevel: C10.2 R12.1 R13.2 U2.7 | length 38.9
  Top Layer w0.3: U2.7 -13.322,-4.933 v1(-13.302,-4.953) ; v1(-4.064,-4.96) -4.063,-4.961 -3.405,-4.961 -2.308,-6.058 -1.816,-6.058 v1(-1.778,-6.096) ; R13.2 R12.1
  Bottom Layer w0.3: v1(-13.302,-4.953) -10.889,-4.953 -10.462,-4.526 -9.319,-4.526 -9.111,-4.318 -8.349,-4.318 -7.707,-4.96 v1(-4.064,-4.96) ; v1(-1.778,-6.096) -1.774,-6.1 -1.774,-6.481 -0.635,-7.62 3.81,-7.62 4.826,-8.636 4.826,-10.033 5.969,-11.176 12.846,-11.176 13.208,-10.814 v1(13.208,-9.29)
Charging: U2.27 U3.7 | length 48.6
  Top Layer w0.3: U2.27 -5.273,-6.433 -5.264,-6.442 -4.099,-6.442 -1.524,-9.017 -1.524,-14.316 -0.708,-15.132 0.778,-15.132 1.813,-14.097 14.478,-14.097 19.558,-9.017 19.558,-1.558 17.873,0.127 17.399,0.127 16.94,0.586 U3.7
CmtIro: R8.1 TP_Tx.1 U2.48 | length 31.1
  Top Layer w0.3: U2.48 -13.909,0.609 -14.951,1.651 -14.951,11.049 -12,14 TP_Tx.1 -7.59,14 -3.048,18.542 R8.1@1.028,18.542
DebugLed: D21.A TP_DBG.1 U2.46 | length 8.6
  Top Layer w0.3: D21.A@-13.427,7.652 -13.49,7.652 -13.508,7.634 -13.508,6.05 -13.427,5.969 -13.427,3.937 -12.909,3.419 U2.46
Extal: U2.25 Y1.3 | length 9.7
  Top Layer w0.3: U2.25@-7.058,-7.428 -7.058,-8.558 -6.604,-9.011 -5.189,-9.011 -4,-10.2 -4,-12.3 -5.157,-13.457 -5.573,-13.457 -6.023,-13.907 Y1.3
EXTAL32: U2.15
GND: C1.1 C2.1 C3.1 C4.1 C5.1 C6.1 C7.1 C8.1 C9.1 C10.1 C11.1 C12.1 C13.1 DP1.2 J1.A1 J1.A12 J1.B1 J1.B12 J1.SH J3.2 J4.1 P1.0 P1.3 P1.5 P1.9 Q1.2 R3.1 R4.2 R6.2 R9.1 R10.2 R13.1 S17.2 S17.2b TP_GND.1 U1.1 U2.2 U2.11 U2.12 U2.23 U3.0 U3.1 U3.3 U4.2 Y1.2 Y1.4 Z1.3 | length 12.2
  Top Layer w0.3: v1(-20.158,-7.112) C7.1 ; v1(-20.158,-5.715) C6.1 ; v1(-20.158,-3.937) C4.1 ; v1(-16.891,-1.397) -16.853,-1.435 -16.853,-1.577 -16.82,-1.61 -16.82,-1.876 -16.263,-2.433 U2.2 ; -8.909,-10.768 U2.23 ; v1(5.588,18.796) 5.61,18.796 5.864,18.542 R3.1 ; Z1.3 11.87,15.988 12.011,16.129 v1(12.065,16.129) ; R9.1 15.672,9.512 U3.3@15.672,7.099 ; v3(16.205,4.724) U3.0@16.291,4.639
  other v1: 12.065,-25.781 5.842,-22.352 -4.6,-22 20.955,-21.971 -19.25,-21 -14.732,-20.955 -25.1,-20.6 -46.5,-20.5 -33.5,-20.5 14.224,-19.431 17.907,-19.431 -19.4,-17.4 -16.383,-17.145 -2.032,-16.68 14,-16.5 -6.061,-15.494 -7.62,-15.367 -3.394,-15.367 2.159,-15.367 -9.779,-14.097 -8.728,-14.097 -23.368,-13.716 -2.886,-13.716 -20.1,-13.6 -42.21,-13.335 -34.671,-13.335 -29.21,-13.335 -16.51,-13.335 -46.322,-13.208 11.938,-12.573 -14.351,-12.446 5.842,-12.446 13.716,-12.065 15.621,-10.433 -6.061,-10.414 -2.759,-10.287 -16.256,-10.033 -24.1,-10 -20.285,-9.652 7.366,-9.525 -15.173,-8.353 -7.747,-8.255 -6.096,-8.255 15.621,-8.147 -23.2,-7.7 -16.858,-7.112 -23.368,-6.731 -45.9,-6.4 -32.9,-6.4 -27.1,-6.3 8.636,-6.223 9.525,-6.223 10.414,-6.223 6.985,-4.572 -23.114,-4.064 -25.019,-3.937 17.526,-2.032 -7.747,-1.27 -2.159,-1.27 -14.986,-1 -2.759,-0.381 -5.7,-0.1 7.874,0.254 -33.02,0.762 -27.94,0.762 19.5,2 -10.541,2.159 -20.857,2.221 13,2.5 -16.602,2.54 -6.985,2.921 19.5,3 4.318,3.048 -2.667,3.067 11.5,3.5 13,3.5 14,4 18.5,4 19.5,4 -16.602,4.2 -1.905,4.318 15,4.4 17.4,4.4 -23.873,4.953 -20.668,4.953 -42,5 19.5,5 -7.819,5.025 -3.81,5.08 15,5.1 17.4,5.1 -5.461,5.207 14,5.5 18.5,5.5 19.5,6 -32.893,6.096 -16.602,6.096 -27.432,6.223 5.969,6.477 19.5,7 -23.873,7.2 -20.668,7.366 -1.27,7.62 19.5,8 -9.144,8.128 1.778,8.382 11.5,8.5 12.5,8.5 18.161,9.017 -16.602,9.2 -20.668,9.525 -41.91,9.779 2.54,10.16 -7.366,10.287 15.621,10.668 -12.319,10.69 2.54,11.43 -20.668,12.446 3.048,12.446 9.144,12.573 -8.89,12.7 -7.62,12.7 15.875,13.081 -33.274,13.589 -43,14 -20.775,14.224 -22.987,14.351 -25.165,14.605 15.113,15.24 -7.258,15.977 10.16,16.002 -7.493,16.745 -2.54,17.78 -12.065,17.799 -33.02,19.431 -41.402,19.939 17.526,20.32 -7.712,21.336 -4.572,21.336 20.828,21.336 -10.795,21.463
IrReceiver: J4.3 TP_Rx.1 U2.30 | length 38.3
  Top Layer w0.3: U2.30 -4.933,-4.933 -4.318,-4.318 -3.302,-4.318 v1(-2.286,-5.334) ; v1(-1.27,-18.269) 10.687,-18.269 11.749,-17.207 17.647,-17.207 J4.3
  Bottom Layer w0.3: v1(-2.286,-5.334) -2.286,-5.388 -2.394,-5.496 -2.394,-6.465 -1.27,-7.589 v1(-1.27,-18.269)
NetC9_2: C9.2 R11.1 U3.4 U3.8 | length 28.4
  Top Layer w0.3: U3.8 18.266,2.269 18.266,0.911 v1(18.288,0.889)
  Top Layer w0.5: C9.2 14.356,6.919 14.402,6.965 14.402,7.099 14.381,7.12 14.381,8.352 v1(13.716,9.017) 13.716,9.896 R11.1
  Bottom Layer w0.3: v1(13.716,9.017) 13.716,10.033 15.24,11.557 20.447,11.557 20.955,11.049 20.955,1.651 20.193,0.889 v1(18.288,0.889)
NetC12_2: C12.2 U4.4 | length 1.8
  Top Layer w0.3: C12.2@6.985,-7.073 8.4,-7.073 8.575,-7.248 U4.4
NetD1_A: D1.A S1.1 | length 21.3
  Top Layer w0.3: D1.A -25.908,-16.175 v1(-25.908,-15.367)
  Bottom Layer w0.3: v1(-25.908,-15.367) -25.908,-17.399 -24.511,-18.796 -16.129,-18.796 -14.859,-17.526 -10.746,-17.526 -9.87,-16.65 -9.72,-16.65 -9.27,-16.2 S1.1
NetD2_A: D2.A S2.1 | length 17
  Top Layer w0.3: v1(-23.114,-0.87) -23.114,-2.467 D2.A
  Bottom Layer w0.3: v1(-23.114,-0.87) -23.095,-0.889 -17.541,-0.889 -17.125,-0.473 -11.514,-0.473 -9.87,-2.117 -9.72,-2.117 -9.27,-2.567 S2.1
NetD3_A: D3.A S3.1 | length 27.9
  Top Layer w0.3: v1(-24.638,11.684) -24.18,11.226 -24.18,11.172 D3.A
  Bottom Layer w0.3: v1(-24.638,11.684) -24.638,17.526 -23.749,18.415 -21.367,18.415 -19.731,16.779 -19.731,13.508 -18.796,12.573 -12.192,12.573 -10.236,10.617 S3.1
NetD4_A: D4.A S4.1 | length 4.5
  Top Layer w0.3: D4.A v1(-11.861,23.953)
  Bottom Layer w0.3: v1(-11.861,23.953) -9.273,23.953 S4.1
NetD5_A: D5.A S5.2 | length 12.6
  Top Layer w0.3: D5.A -26.597,-17.526 v1(-24.257,-17.526)
  Bottom Layer w0.3: v1(-24.257,-17.526) -23.603,-18.18 -18.688,-18.18 -17.73,-17.222 S5.2
NetD6_A: D6.A S6.2 | length 9.2
  Top Layer w0.3: D6.A -25.146,-2.586 v1(-25.146,-1.651)
  Bottom Layer w0.3: v1(-25.146,-1.651) -25.124,-1.651 -24.87,-1.397 -19.05,-1.397 S6.2
NetD7_A: D7.A S7.2 | length 9.3
  Top Layer w0.3: D7.A -25.29,10.631 -25.29,10.177 -24.638,9.525 -22.072,9.525 v1(-20.724,10.874)
  Bottom Layer w0.3: v1(-20.724,10.874) -17.987,10.874 S7.2
NetD8_A: D8.A S8.2 | length 7
  Top Layer w0.3: D8.A v1(-19.1,23.953)
  Bottom Layer w0.3: v1(-19.1,23.953) -17.733,23.953 S8.2
NetD9_A: D9.A S9.2 | length 3
  Top Layer w0.3: v1(-31.877,-16.256) -30.18,-16.256 D9.A
  Bottom Layer w0.3: v1(-31.877,-16.256) -30.936,-16.256 S9.2
NetD10_A: D10.A S10.2 | length 2.9
  Top Layer w0.3: v1(-29.009,-2.72) D10.A@-27.82,-2.72
  Bottom Layer w0.3: S10.2@-30.73,-2.72 v1(-29.009,-2.72)
NetD11_A: D11.A S11.2 | length 2.9
  Top Layer w0.3: v1(-28.882,10.615) D11.A@-27.693,10.615
  Bottom Layer w0.3: S11.2@-30.603,10.615 v1(-28.882,10.615)
NetD12_A: D12.A S12.2 | length 2.9
  Top Layer w0.3: v1(-29.009,23.95) -27.82,23.95 D12.A
  Bottom Layer w0.3: S12.2 v1(-29.009,23.95)
NetD13_A: D13.A S13.2 | length 2.2
  Top Layer w0.3: v1(-42.368,-16.052) D13.A
  Bottom Layer w0.3: S13.2 -43.728,-16.052 v1(-42.368,-16.052)
NetD14_A: D14.A S14.2 | length 2.9
  Top Layer w0.3: v1(-41.963,-2.72) D14.A@-40.774,-2.72
  Bottom Layer w0.3: S14.2@-43.684,-2.72 v1(-41.963,-2.72)
NetD15_A: D15.A S15.2 | length 2.9
  Top Layer w0.3: v1(-41.963,10.615) D15.A@-40.774,10.615
  Bottom Layer w0.3: S15.2@-43.684,10.615 v1(-41.963,10.615)
NetD16_A: D16.A S16.2 | length 2.9
  Top Layer w0.3: v1(-41.963,23.95) D16.A@-40.774,23.95
  Bottom Layer w0.3: S16.2@-43.684,23.95 v1(-41.963,23.95)
NetD21_K: D21.K R6.1 | length 1.1
  Top Layer w0.3: D21.K R6.1@-12.409,9.234
NetJ1_A5: J1.A5 R3.2 | length 3.1
  Top Layer w0.3: R3.2 8.37,18.627 8.57,18.827 8.921,18.827 9.725,19.631 J1.A5
NetJ1_B5: J1.B5 R4.1 | length 9.8
  Top Layer w0.3: R4.1 v1@19.812,24.13
  Bottom Layer w0.3: J1.B5 12.336,22.331 12.336,22.747 13.306,23.717 16.478,23.717 16.891,24.13 v1(19.777,24.13)
NetJ2_2: J2.2 R7.2 | length 2.5
  Top Layer w0.3: R7.2 J2.2
NetQ1_1: Q1.1 R8.2 | length 2.8
  Top Layer w0.3: R8.2 2.655,16.34 2.805,16.19 Q1.1@3.066,16.19
NetQ1_3: Q1.3 R7.1 | length 9.1
  Top Layer w0.3: Q1.3 7.178,15.24 9.525,15.24 9.838,14.927 12.26,14.927 R7.1@13.728,16.395
NetR9_2: R9.2 U3.2 | length 2.5
  Top Layer w0.5: U3.2@16.942,7.099 16.942,9.31 17.057,9.425 R9.2@17.057,9.525
PwrEnable: U2.31 U4.3 | length 19.1
  Top Layer w0.3: U2.31 -5.666,-4.433 -5.628,-4.471 -5.191,-4.471 -4.404,-3.683 -3.175,-3.683 v1(-2.286,-4.572) ; v1(1.778,-5.08) 1.778,-4.064 2.413,-3.429 8.001,-3.429 8.575,-4.003 U4.3
  Bottom Layer w0.3: v1(-2.286,-4.572) -1.751,-5.107 1.751,-5.107 v1(1.778,-5.08)
RESETb: P1.10 S17.1 S17.1b U2.26 | length 58.6
  Top Layer w0.3: S17.1b S17.1 -14.907,-18.875 -12.954,-20.828 -10.277,-20.828 -9.642,-20.193 v1(-7.112,-20.193) 10.501,-20.193 10.677,-20.369 10.677,-22.314 10.178,-22.813 10.178,-22.834 9.92,-23.091 P1.10 ; v1(-7.112,-16.51) -3.013,-16.51 -2.032,-15.529 -2.032,-9.271 -4.37,-6.933 U2.26
  Bottom Layer w0.3: v1(-7.112,-20.193) v1(-7.112,-16.51)
SpiMISO: DP1.13 MISO.1 U2.40 | length 19.8
  Top Layer w0.3: U2.40 -9.909,4.696 -5.588,9.017 -5.588,10.922 MISO.1@-2.77,13.74 ; MISO.1 DP1.13
SpiMOSI: DP1.6 DP1.12 SCK.1 U2.39 | length 35.3
  Top Layer w0.3: U2.39 -9.409,4.18 -4.572,9.017 -4.572,10.541 -3.683,11.43 SCK.1 ; DP1.6 1.778,-2.032 1.778,-1.143 2.413,-0.508 2.413,9.017 DP1.12
  Bottom Layer w0.3: SCK.1 DP1.12
SpiSck: DP1.7 DP1.10 MOSI.1 U2.38 | length 24.3
  Top Layer w0.3: U2.38 -8.909,1.378 -8.509,1.778 -5.842,1.778 -5.08,2.54 1.524,2.54 ; MOSI.1 DP1.10 1.524,4.826 1.524,2.54 ; DP1.7 1.524,0.254 1.524,2.54
Standby: U2.28 U3.6 | length 46
  Top Layer w0.3: U2.28 -5.169,-5.933 -5.087,-6.015 -3.891,-6.015 -3.23,-6.676 -1.027,-8.879 -1.027,-12.4 -0.727,-12.7 0.797,-12.7 1.705,-13.608 13.824,-13.608 19.05,-8.382 19.05,-1.654 17.777,-0.381 17.145,-0.381 15.685,1.079 15.685,2.309 U3.6
SWD_CLK: P1.4 U2.17 | length 42.6
  Top Layer w0.3: v1(-12.319,-20.085) -12.357,-20.047 -12.357,-19.52 -13.462,-18.415 -13.462,-11.557 -13.138,-11.233 -13.138,-11.231 -11.909,-10.002 U2.17
  Bottom Layer w0.3: v1(-12.319,-20.085) -12.281,-20.123 -11.754,-20.123 -10.922,-20.955 -5.842,-20.955 -4.826,-19.939 6.096,-19.939 6.985,-20.828 6.985,-22.86 8.382,-24.257 12.743,-24.257 P1.4
SWD_DIO: P1.2 U2.20 | length 46.7
  Top Layer w0.3: U2.20 -10.409,-10.409 -11.938,-11.938 -11.938,-17.272 -10.414,-18.796 15.367,-18.796 17.653,-21.082 17.653,-23.495 16.637,-24.511 15.494,-24.511 15,-24.017 P1.2
SWD_RX: P1.8 U2.18 | length 38.1
  Top Layer w0.3: U2.18 -11.409,-10.139 -12.954,-11.684 -12.954,-18.034 -11.338,-19.65 10.816,-19.65 11.19,-20.024 P1.8
SWD_TX: P1.6 U2.19 | length 38.3
  Top Layer w0.3: U2.19@-10.909,-8.778 -10.909,-10.274 -12.446,-11.811 -12.446,-17.653 -10.876,-19.223 10.993,-19.223 11.703,-19.933 11.703,-22.513 P1.6
SwitchC1: D1.K D5.K D9.K D13.K U2.41 | length 48.8
  Top Layer w0.3: D13.K -26.039,-18.752 D1.K ; D1.K@-25.868,-18.796 -24.003,-18.796 -23.152,-17.945 -23.152,-17.669 -23.368,-17.453 v1(-23.368,-17.399) ; v1(-12.573,-2.032) -10.585,-2.032 -10.409,-1.856 U2.41
  Bottom Layer w0.3: v1@-23.346,-17.399 -20.955,-17.399 -20.701,-17.145 -20.701,-14.955 -21.082,-14.574 -21.082,-9.312 -21.684,-8.71 -21.684,-5.002 -21.508,-4.826 -15.461,-4.826 -13.965,-3.33 -13.965,-2.822 -13.175,-2.032 v1(-12.573,-2.032)
SwitchC2: D2.K D6.K D10.K D14.K U2.42 | length 40.4
  Top Layer w0.3: D14.K v1(-26.586,-5.29) -22.991,-5.29 D2.K ; U2.42 -10.909,0.613 -10.668,0.855 v1(-10.668,0.889)
  Bottom Layer w0.3: v1(-26.586,-5.29) -26.586,-1.914 -24.718,-0.046 -12.619,-0.046 -11.684,0.889 v1(-10.668,0.889)
SwitchC3: D3.K D7.K D11.K D15.K U2.43 | length 56.1
  Top Layer w0.3: D15.K D11.K@-27.944,8.045 ; D11.K -27.9,8.128 D7.K@-25.531,8.128 ; D7.K D3.K D3.K@-23.863,8.155 ; U2.43 -11.409,2.815 v1(-11.049,3.175)
  Bottom Layer w0.3: v1(-24.765,8.128) -24.765,9.271 -23.749,10.287 -23.749,17.731 -23.573,17.907 -21.463,17.907 -20.248,16.692 -20.248,13.421 -18.973,12.146 -12.654,12.146 -11.049,10.541 v1(-11.049,3.175)
SwitchC4: D4.K D8.K D12.K D16.K U2.44 | length 64.2
  Top Layer w0.3: D16.K -24.896,21.38 D8.K D4.K ; U2.44 -11.909,3.855 v1(-6.676,9.089)
  Bottom Layer w0.3: v1(-20.955,21.209) -20.955,19.275 -18.952,17.272 -6.907,17.272 -6.731,17.096 -6.731,9.939 -6.676,9.884 v1(-6.676,9.089)
SwitchR1: S1.2 S2.2 S2.2b S3.2 S3.2b S4.2b U2.34 | length 48
  Top Layer w0.3: v1(-9.746,-5.588) -9.746,-4.446 -8.233,-2.933 U2.34
  Bottom Layer w0.3: S1.2 S2.2b -4.73,-8.714 -6.619,-6.825 -9.779,-6.825 -10,-6.604 -10,-5.896 -9.746,-5.642 v1(-9.746,-5.588) -3.683,-5.588 -3.448,-5.353 -3.448,-3.224 -3.624,-3.048 S2.2@-4.73,-3.048 ; S2.2 S3.2b -4.907,2.894 -4.907,10.44 S3.2 -4.907,10.794 -4.907,15.873 S4.2b
SwitchR2: S5.1 S6.1 S6.1b S7.1 S7.1b S8.1b U2.47 | length 45.7
  Top Layer w0.3: v1(-24.003,-2.199) v1(-24.003,1.397) ; v1(-13.462,1.397) -13.462,1.343 -13.409,1.29 U2.47
  Bottom Layer w0.3: v1(-24.003,-2.199) -22.637,-2.199 S6.1@-22.27,-2.567 ; v1(-24.003,1.397) -22.095,1.397 ; S7.1@-22.352,10.617 S8.1b@-22.352,15.667 ; S5.1 S6.1b S6.1 ; S7.1 S7.1b -22.078,2.525 -22.078,1.414 -22.095,1.397 ; v1(-13.462,1.397) -22.095,1.397
SwitchR3: S9.1 S10.1 S10.1b S11.1 S11.1b S12.1b U2.37 | length 62.1
  Top Layer w0.3: U2.37 -8.409,0.491 v1(-8.1,0.8)
  Bottom Layer w0.3: S9.1 S10.1b S10.1 -35.27,-1.016 ; S12.1b S11.1 S11.1b -35.27,-1.016 ; v1(-8.1,0.8) -8.135,0.835 -8.455,0.835 -9.144,1.524 -11.938,1.524 -13.081,0.381 -25.146,0.381 -26.543,-1.016 -35.27,-1.016
SwitchR4: S13.1 S14.1 S14.1b S15.1 S15.1b S16.1b U2.21 | length 82.6
  Top Layer w0.3: v1(-10.287,-18.161) -11.303,-17.145 -11.303,-11.938 -9.909,-10.544 U2.21
  Bottom Layer w0.3: S16.1b S15.1 S15.1b S14.1 -48.27,-4.602 -48.227,-4.645 -48.227,-4.699 -48.227,-4.753 -48.27,-4.796 S14.1b S13.1 -48.27,-16.2 -47.82,-16.65 -47.67,-16.65 -44.762,-19.558 -15.494,-19.558 -14.097,-18.161 v1(-10.287,-18.161)
TftBacklight: DP1.8 T_BL.1 U2.32 | length 14.6
  Top Layer w0.3: U2.32 -5.421,-3.933 v1(-5.409,-3.944) ; v1(-7,0.9) -6.63,1.27 -2.286,1.27 DP1.8
  Bottom Layer w0.3: v1(-7,0.9) -7,0.455 -6.188,-0.357 -6.188,-3.573 -5.809,-3.953 -5.419,-3.953 v1(-5.409,-3.944)
TftCs: DP1.3 T_CS.1 U2.33 | length 21.6
  Top Layer w0.3: U2.33 -5.833,-3.433 -5.575,-3.175 -2.903,-3.175 -1.143,-4.935 -1.143,-6.697 -0.22,-7.62 3.556,-7.62 4.191,-8.255 4.191,-10.922 3.683,-11.43 T_CS.1 DP1.3
TftDc: DP1.5 T_DC.1 U2.35 | length 11.7
  Top Layer w0.3: U2.35 -5.167,-2.433 -4.852,-2.748 -2.726,-2.748 -0.716,-4.758 -0.716,-5.369 0,-6.085 DP1.5 T_DC.1
TftReset: DP1.4 T_Rst.1 U2.29 | length 11
  Top Layer w0.3: U2.29 -5.065,-5.433 -4.91,-5.588 -3.381,-5.588 -0.079,-8.89 DP1.4 T_Rst.1
TouchCs: DP1.11 TP_CS.1 U2.36 | length 23
  Top Layer w0.3: U2.36 -4.967,-1.933 -4.579,-2.321 0.727,-2.321 1.27,-1.778 1.27,-0.889 1.986,-0.173 1.986,6.904 DP1.11 TP_CS.1
TouchIrq: DP1.14 T_IRQ.1 U2.45 | length 23.4
  Top Layer w0.3: U2.45 -12.409,5.371 -10.541,7.239 -10.541,8.509 T_IRQ.1@-2.77,16.28 ; T_IRQ.1 DP1.14
USB_DM: R2.2 U2.4 | length 5
  Top Layer w0.3: R2.2 -19.097,-1.985 -18.796,-2.286 -17.933,-2.286 -16.791,-3.428 U2.4@-15.258,-3.428
USB_DP: R1.2 U2.3 | length 3.4
  Top Layer w0.3: R1.2 -17.879,-1.402 -17.656,-1.625 -17.656,-1.775 -17.081,-2.349 -16.498,-2.933 U2.3@-15.262,-2.933
USBD_R_N: J1.A7 J1.B7 R2.1 Z1.2 | length 52.5
  Top Layer w0.381: R2.1 -19.015,0.098 -18.856,0.258 -18.856,15.697 -17.808,16.745 -16.828,17.726 v1(-16.642,17.912) ; Z1.2@10.143,18.562 v1(10.143,19.122) 11.396,20.375 11.396,20.891 J1.A7 11.379,20.966 11.379,21.338 10.575,22.142 J1.B7
  Bottom Layer w0.381: v1(-16.642,17.912) -15.503,19.05 2.527,19.05 3.602,17.975 10.157,17.975 10.38,18.198 10.38,18.513 10.165,18.728 10.165,19.099 v1(10.143,19.122)
USBD_R_P: J1.A6 J1.B6 R1.1 Z1.1 | length 53.2
  Top Layer w0.381: R1.1 -18.061,0.098 -18.221,0.258 -18.221,15.434 -17.545,16.11 -16.193,17.462 v1(-15.856,17.799) ; Z1.1@11.944,18.299 v1(11.944,19.272)
  Bottom Layer w0.381: v1(-15.856,17.799) -15.24,18.415 2.264,18.415 3.339,17.34 10.42,17.34 11.171,18.09 11.171,18.499 v1(11.944,19.272) ; J1.B6 11.379,22.224 11.379,21.852 10.575,21.048 J1.A6 10.621,20.874 10.621,20.56 v1@11.909,19.272
V+: C2.2 D20.K Q2.2 U1.3 U4.1 | length 18.1
  Top Layer w0.5: Q2.2 5.733,8.872 6.604,8.001 7.935,8.001 7.935,2.082 7.985,2.032 8.458,2.032 8.508,1.982 9.906,0.584 9.906,-3.175 10.475,-3.744 U4.1
Vout3V3: C4.2 U2.5 | length 2.6
  Top Layer w0.3: C4.2 -17.838,-3.933 U2.5
VREFO: U2.13
XTAL: U2.24 Y1.1 | length 3.6
  Top Layer w0.3: U2.24 -8.409,-9.752 -7.967,-10.194 Y1.1@-7.967,-12.218
XTAL32: U2.14
pads on no net: DP1.9 J1.A8 J1.B8 S1.1b S1.2b S2.1b S3.1b S4.1b S4.2 S5.1b S5.2b S6.2b S7.2b S8.1 S8.2b S9.1b S9.2b S10.2b S11.2b S12.1 S12.2b S13.1b S13.2b S14.2b S15.2b S16.1 S16.2b

## Polygon pours and split planes (outlines as drawn)
GND on Top Layer "Top Layer-No Net" (solid, remove dead copper, pour order 2): -53.307,-29 -53.307,28 22.987,28 22.987,-29
3V3 on Top Layer "Top Layer-No Net" (solid, pour order 0): -13.855,-1.933 -8.36,-1.933 -8.36,-7.521 -13.855,-7.521
GND on Bottom Layer "Top Layer-No Net" (solid, remove dead copper, pour order 1): -53.18,28 23.038,28 23.038,-28 -53.18,-28

## Keep-outs
Keep-Out Layer:
  the board outline again, w0.5

## Silkscreen, mask and mechanical layers (free items; w line width, h text height)
Top Overlay:
  lines w0.254: -4,0 4,0
  text "V+" at 18.796,17.526 h1.5
  text "D" at 18.923,15.494 h1.5
  text ".Description" at -39.497,3.937 h1.27
  text ".Revision" at -39.497,1.778 h1.27
  text "+" at 19.177,-4.731 h2
  text "-" at 19.177,-6.731 h2
  text "G" at 18.923,-14.224 h1.5
  text "V" at 18.923,-16.256 h1.5
  text "S" at 18.923,-18.415 h1.5
Bottom Overlay:
  lines w0.254: -1.778,0 2.159,0
Mechanical 1:
  lines w0.1: 0,-20.828 0,-18.669 ; 20,0 22,0
  lines w0.254: -39,0 -36,0 ; 0,16.51 0,27.178

## Dimensions
-33,-20 to -46,-20 on Mechanical 16
22,0 to 16.27,-22.635 on Mechanical 1
0,-20.828 to 12.46,-24.032 on Mechanical 1
-39,0 to -19,-17 on Mechanical 1
-19,-17 to 0,-20.828 on Mechanical 1
-7,-21.016 to -20,-19.365 on Mechanical 16
-33,-7.237 to -20,-19.365 on Mechanical 16
-3,27 to -51,27 on Mechanical 1
0,-16.51 to -7,-20.635 on Mechanical 16
0,27.178 to -51,27 on Mechanical 1
-51,27 to 22,27 on Mechanical 1
4.988,21.012 to 5,-21 on Mechanical 1
-51,27 to -51,-27 on Mechanical 1
11,24.37 to 0,16.51 on Mechanical 1

## Text inside footprints (layer, text, board x,y; h text height)
DP1: Bottom Overlay "T_SDO" at 1.891,14.97 h1.5 r180; Bottom Overlay "D_CS" at 1.891,-10.43 h1.5 r180; Bottom Overlay "T_IRQ" at 1.891,17.51 h1.5 r180; Bottom Overlay "D_SCK" at 1.891,-0.27 h1.5 r180; Bottom Overlay "T_SCK" at 1.891,7.35 h1.5 r180; Bottom Overlay "D_RST" at 1.891,-7.89 h1.5 r180; Bottom Overlay "D_SDO" at 1.891,4.81 h1.5 r180; Bottom Overlay "D_LED" at 1.891,2.27 h1.5 r180; Bottom Overlay "D_DC" at 1.891,-5.35 h1.5 r180; Bottom Overlay "T_SDI" at 1.891,12.43 h1.5 r180; Bottom Overlay "Vcc" at 1.778,-15.494 h1.5 r180; Bottom Overlay "D_SDI" at 1.891,-2.81 h1.5 r180; Bottom Overlay "Gnd" at 1.891,-12.97 h1.5 r180; Bottom Overlay "T_CS" at 1.891,9.89 h1.5 r180
Logo1: Top Overlay "OSHW" at -35.357,-2.997 h0.76; Top Overlay "o" at -31.902,-5.613 h10.16